# EAGLE board PiPowerSupply (EAGLE 7.2.0)
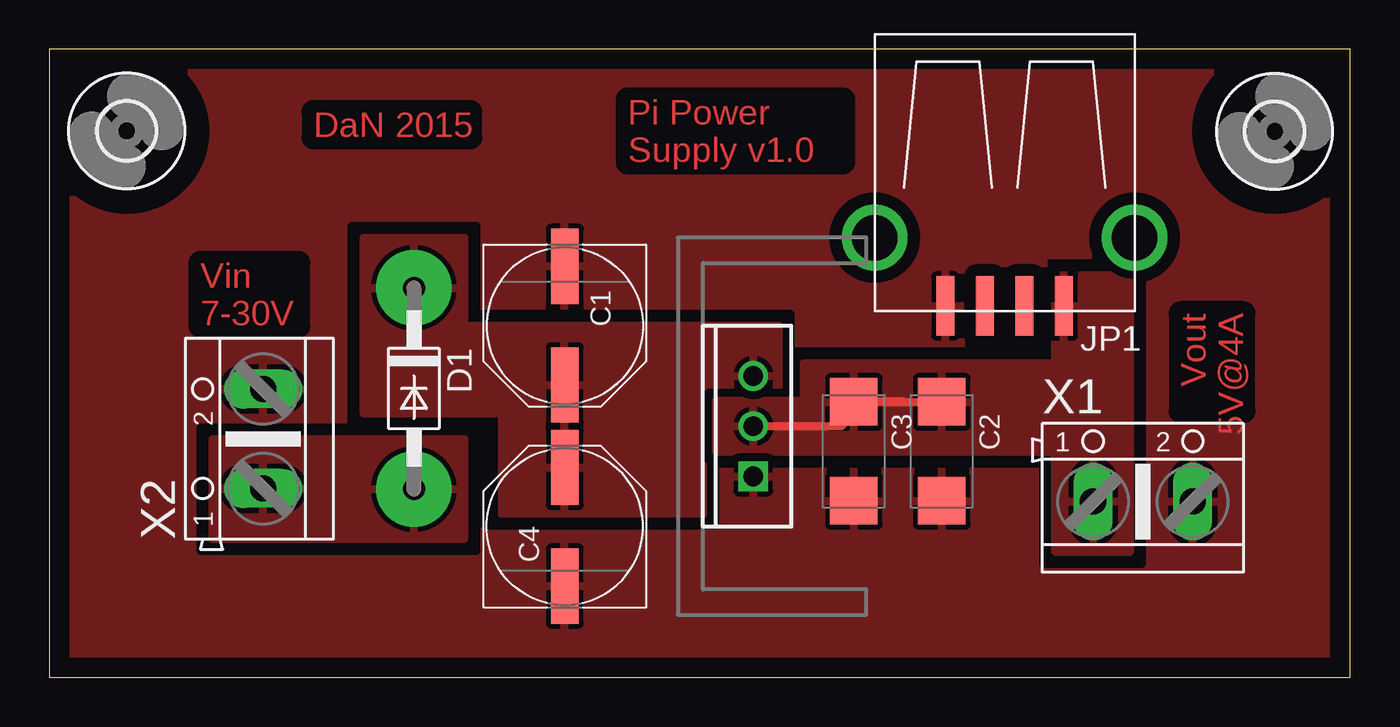
[diagram p0: board, top side]

Size 65.71 x 31.74 mm. Coordinates in mm from the lower left corner, seen from the top.
Outline: 0,0 65.71,0 65.71,31.74 0,31.74 0,0
Copper layers (1*16): Top 0.035mm / dielectric 1.5mm / Bottom 0.035mm
Design rules "default": minimum track width 10mil, minimum drill 24mil, track to track 8mil, track to pad 8mil, pad to pad 8mil, via to via 8mil, smd to smd 8mil, copper to edge 40mil, drill to drill 8mil, minimum pad ring 10mil, minimum via ring 8mil, stop-mask expansion 4mil, vias tented up to drill 0mil, thermal gap 10mil

## Footprints (pad centres in the part's own frame; a part is rotated, then mirrored left to right if it is on the bottom)
PANASONIC_E = smd 3.8 x 1.4: + 3,0; - -3,0
SMC_C = smd 2.4 x 2.4: + -2.5,0; - 2.5,0
DO41-10 = drill 1.118 pad 3.81: A 5.08,0; C -5.08,0
2,8 = hole 2.8: 0,0
USB-A-S = smd 3 x 0.9: D+ 3.45,-1; D- 3.45,1; GND 3.45,-3; VBUS 3.45,3 | drill 2.311: P$5 0,-6.566; P$6 0,6.566
TO220-ADJ = drill 1 square: ADJ -2.54,0 | drill 1: IN 2.54,0; OUT 0,0
AK500/2 = drill 1.321 long: 1 -2.515,0; 2 2.515,0

## Placement (x,y rotation side)
C1  10u  [PANASONIC_E]  26.04,17.78 270 top
C2  10u  [SMC_C]  45.09,11.43 270 top
C3  10u  [SMC_C]  40.64,11.43 270 top
C4  10u  [PANASONIC_E]  26.04,7.62 90 top
D1  1N4004  [DO41-10]  18.41,14.6 270 top
H1  MOUNT-HOLE2.8  [2,8]  61.9,27.6 0 top
H2  MOUNT-HOLE2.8  [2,8]  3.9,27.62 0 top
JP1  USB-A-S  [USB-A-S]  48.26,22.23 270 top
U$1  V_REG_317SINK  [TO220-ADJ]  35.56,12.7 90 top
X1  [AK500/2]  55.24,8.89 0 top
X2  [AK500/2]  10.8,12.06 90 top

## Library data of the parts
C1-C4 = rcl
D1 = dan
H1 H2 = holes
JP1 = SparkFun-Connectors
U$1 = SparkFun-3-2-07
X1 X2 = con-ptr500; OC_FARNELL: unknown; OC_NEWARK: unknown

## Nets
GND: C1.- C2.- C3.- C4.- JP1.GND U$1.ADJ X1.2 X2.2
N$3: D1.A X2.1
VIN: C1.+ C4.+ D1.C U$1.IN
VOUT: C2.+ C3.+ JP1.VBUS U$1.OUT X1.1

## Tracks (layer width: path | path; a pad name or v marks a point on that pad's centre or on a via)
GND
  pour Top (isolate 0.61, rank 3): 0.63,0.63 65.41,0.63 65.41,31.75 0.63,31.75
N$3
  pour Top (isolate 0.406): 8.25,6.98 8.25,12.06 20.95,12.06 20.95,6.98
VIN
  pour Top (isolate 0.406, rank 2): 36.83,13.97 33.02,13.97 33.02,8.26 22.86,8.26 22.86,13.34 15.88,13.34 15.88,22.23 20.95,22.23 20.95,17.78 36.83,17.78
VOUT
  Top 0.406: U$1.OUT 40.01,12.7 41.27,13.97 43.14,13.97 C3.+ C2.+
  pour Top (isolate 0.406): 33.66,11.43 50.8,11.43 50.8,6.35 54.61,6.35 54.61,20.32 50.8,20.32 50.8,15.88 38.1,15.88 38.1,13.97 33.66,13.97

## Text on the board
Top: DaN 2015 | Pi Power / Supply v1.0 | Vout / 5V@4A | Vin / 7-30V